# Altium PCB 消防背表.PcbDoc
Units mil, origin at the board's own origin, x right, y up, seen from the top; angles counter-clockwise.
Board outline 6000 x 4000 mil, 2 copper layers (Top Layer, Bottom Layer); 95 components, 78 nets, 353 pads, 243 vias.
Unrouted connection lines stored in the file: 2.
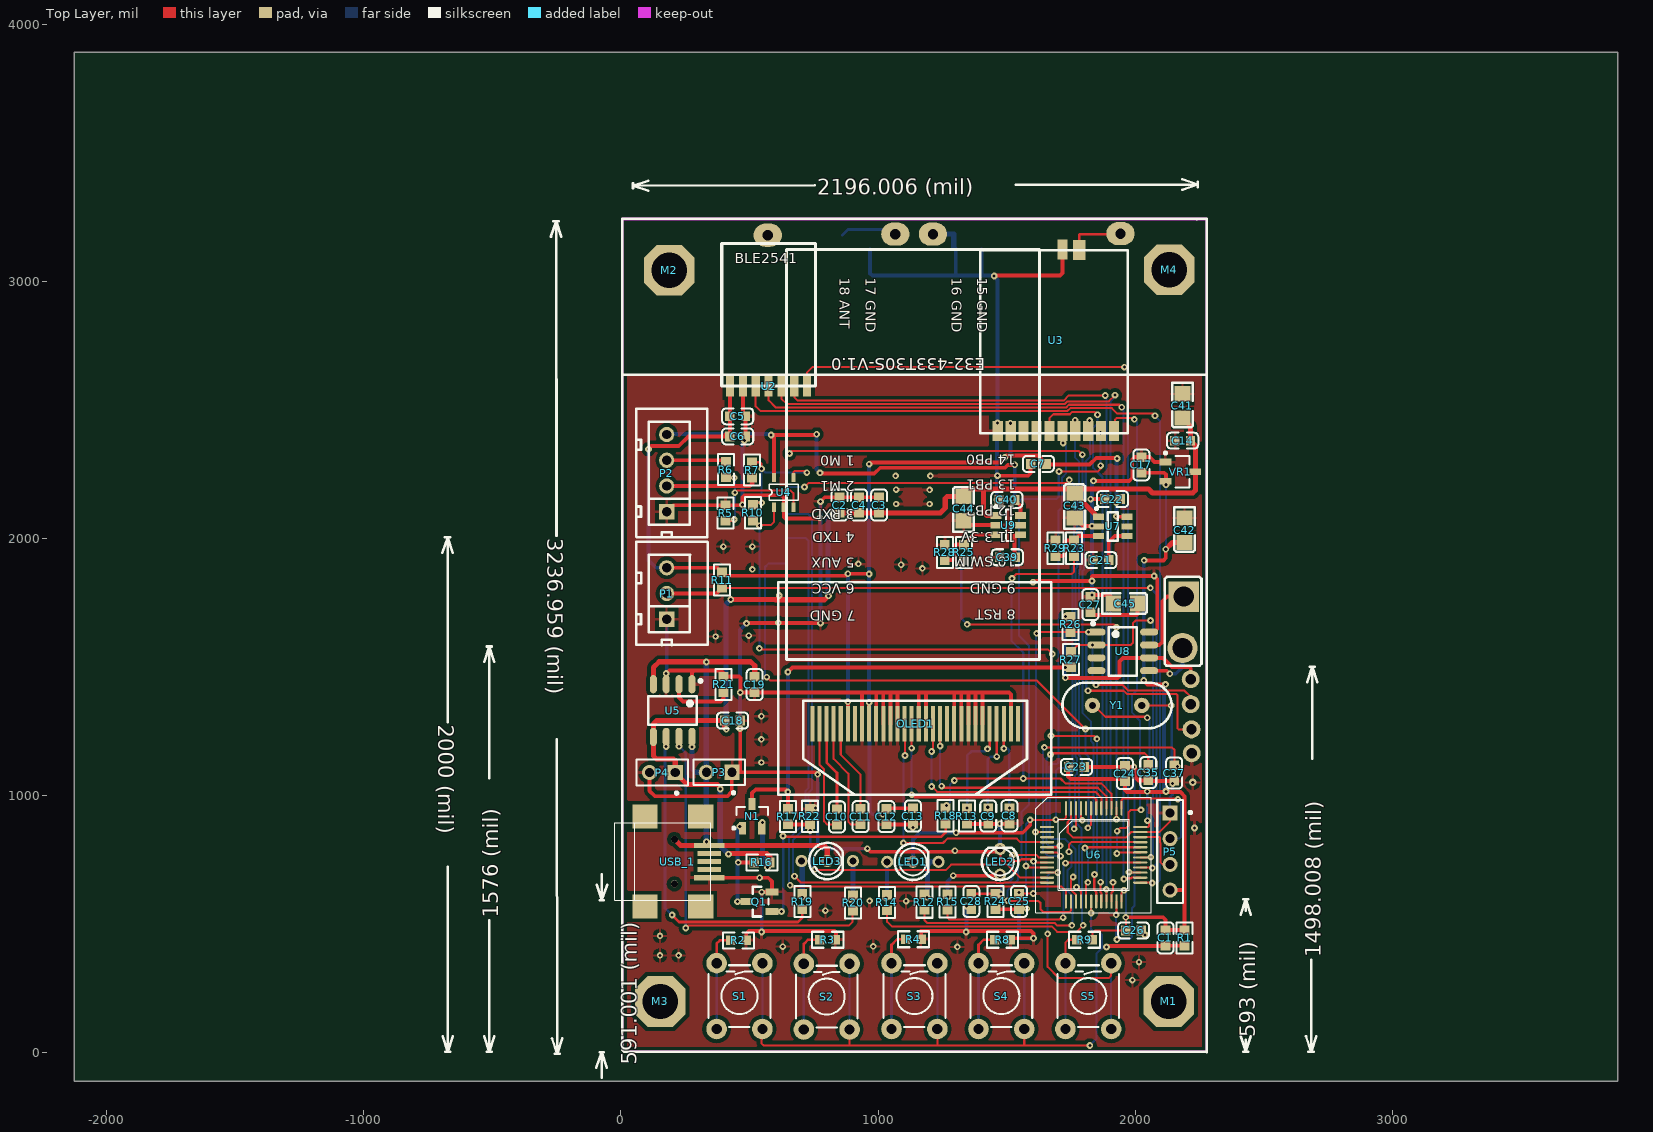
[diagram p0: Top Layer view]
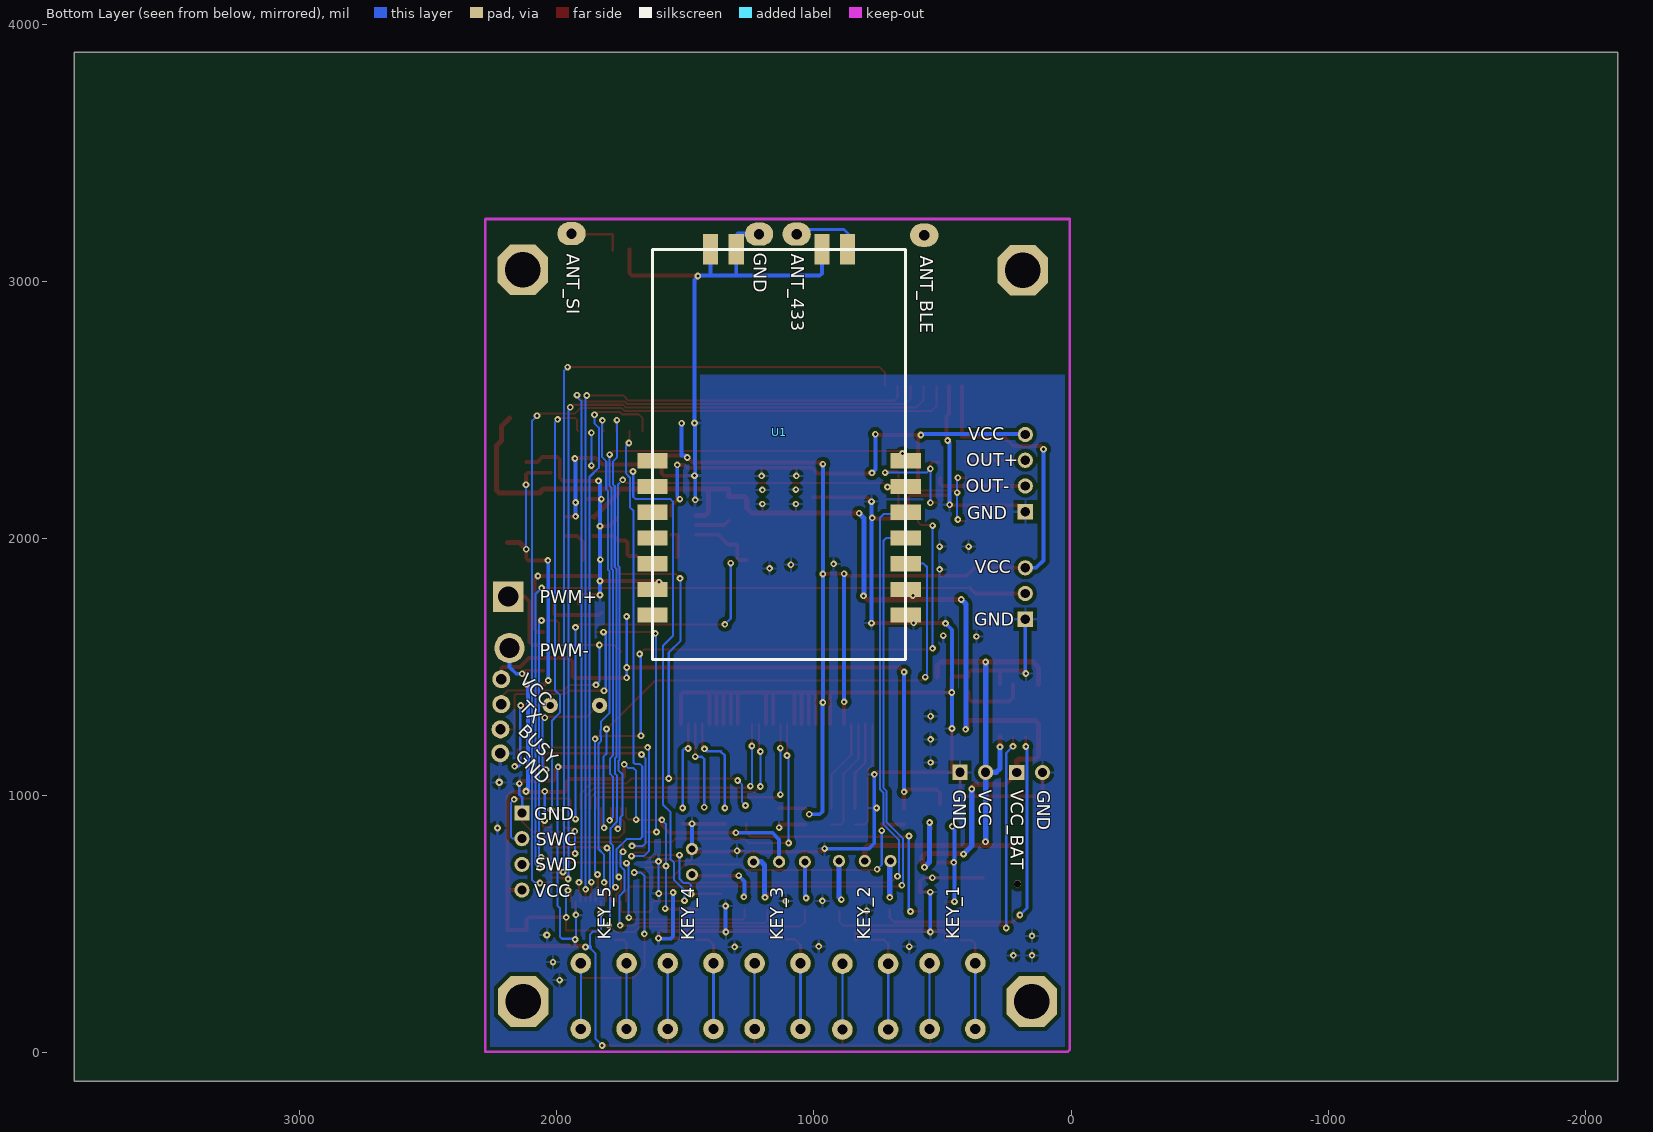
[diagram p1: Bottom Layer view, seen from below]
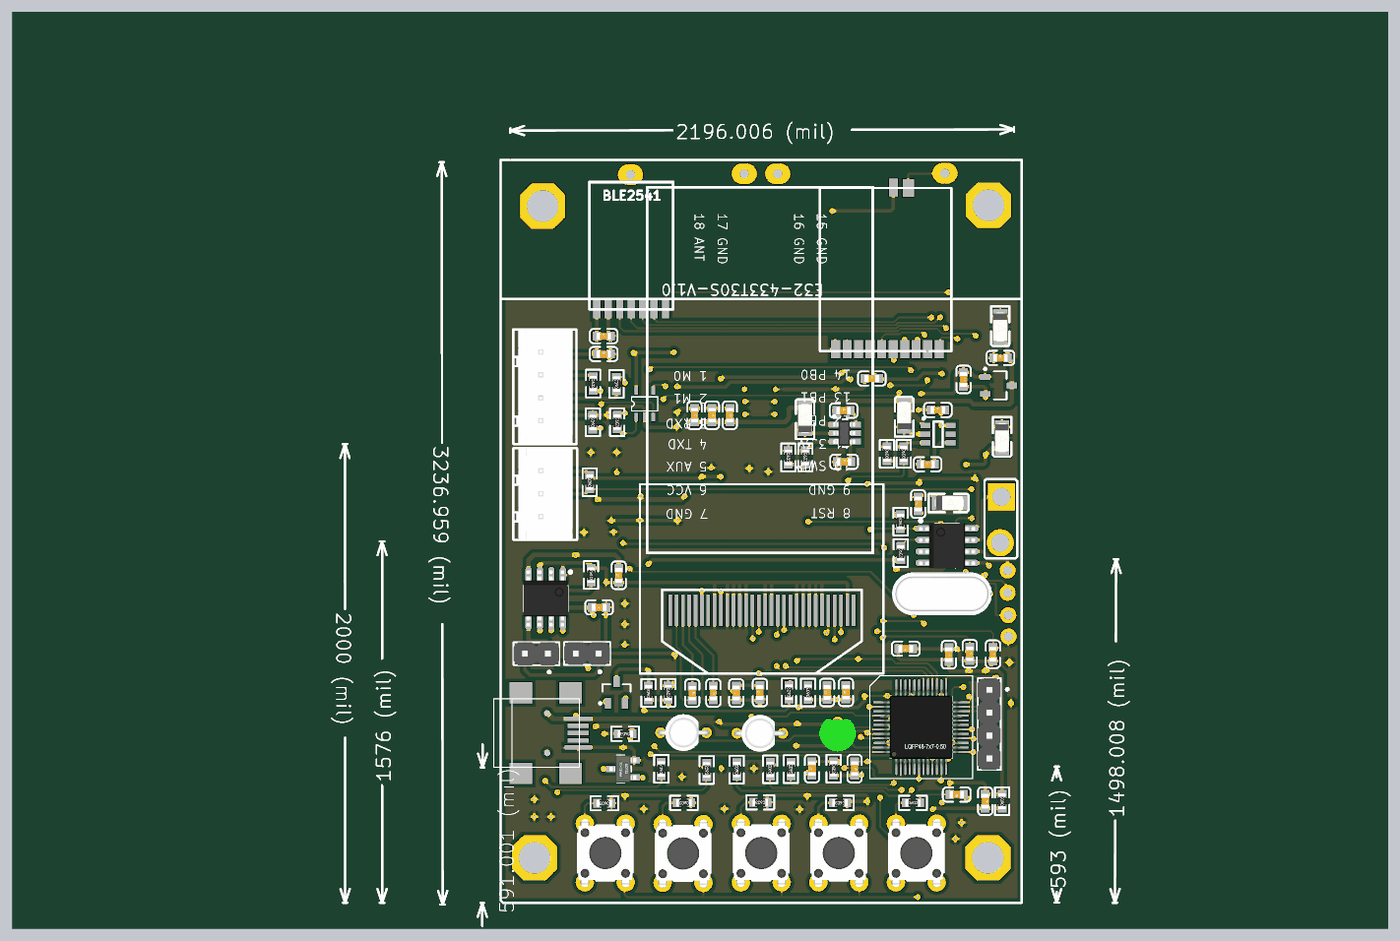
[diagram p2: 3D render of the assembled board from above, using the file's embedded part models]

## Layer stack, top to bottom
Top Solder: solder mask 0.4, Solder Resist, Dk 3.5
Top Layer: signal copper 1.4
Dielectric1: dielectric 12.6, FR-4, Dk 4.8
Bottom Layer: signal copper 1.4
Bottom Solder: solder mask 0.4, Solder Resist, Dk 3.5

## Board outline
-2125,-110 3875,-110 3875,3890 -2125,3890

## Design rules (kind name [scope] priority, off if disabled: settings)
Clearance [All] p1: gap=5 ignorepadtopadclearanceinfootprint=FALSE except(0: Arc-Hole Track-Hole SMDPad-Hole THPad-Hole Via-Hole Fill-Hole Poly-Hole Region-Hole Text-Hole)
PlaneConnect [All] p1: planeconnectstyle=Relief reliefexpansion=20 reliefentries=4 reliefconductorwidth=16 reliefairgap=10
PolygonConnect [All] p1: connectstyle=Relief reliefconductorwidth=10 reliefentries=4 polygonreliefangle="90 Angle" airgapwidth=10
RoutingVias [All] p1: holewidth=12 width=26 viastyle="Through Hole" minholewidth=12 minwidth=26 maxholewidth=12 maxwidth=26
SolderMaskExpansion [All] p1: expansion=4
Width [All] p1: maxlimit=50 minlimit=8 preferedwidth=10
29 further rules are at their usual default settings.

## Components (designator, comment, footprint, x,y, rotation, side; value= is the part's Value field where it differs from the comment)
C1 "100nF (104) 10% 50V" 0603_C 2117,447 r270 top
C2 "1uF (105) 10% 50V" 0603_C 850,2130 r270 top
C3 "10uF (106) 10% 10V" 0603_C 1004,2130 r270 top
C4 "100nF (104) 10% 50V" 0603_C 926,2130 r270 top
C5 "100nF (104) 10% 50V" 0603_C 454,2475 r0 top
C6 "1uF (105) 10% 50V" 0603_C 454,2397 r0 top
C7 "1uF (105) 10% 50V" 0603_C 1623,2290 r0 top
C8 "1uF (105) 10% 50V" 0603_C 1510,922 r90 top
C9 "1uF (105) 10% 50V" 0603_C 1428,921 r90 top
C10 "100nF (104) 10% 50V" 0603_C 840,918 r270 top
C11 "100nF (104) 10% 50V" 0603_C 932,919 r270 top
C12 "100nF (104) 10% 50V" 0603_C 1032,919 r90 top
C13 "1uF (105) 10% 50V" 0603_C 1135,921 r90 top
C14 "100nF (104) 10% 50V" 0603_C 2184,2380 r0 top
C17 "100nF (104) 10% 50V" 0603_C 2023,2286 r270 top
C18 "10uF (106) 10% 10V" 0603_C 434,1292 r180 top
C19 "10uF (106) 10% 10V" 0603_C 520,1432 r90 top
C21 "470pF (471) 10% 50V" 0603_C 1866,1916 r0 top
C22 "100nF (104) 10% 50V" 0603_C 1911,2153 r0 top
C23 "100nF (104) 10% 50V" 0603_C 1771,1112 r180 top
C24 "100nF (104) 10% 50V" 0603_C 1959,1086 r270 top
C25 "100nF (104) 10% 50V" 0603_C 1548,589 r270 top
C26 "100nF (104) 10% 50V" 0603_C 1993,476 r180 top
C27 "4.7uF (475) 10% 16V" 0603_C 1825,1743 r90 top
C28 "100nF (104) 10% 50V" 0603_C 1362,589 r90 top
C35 "22pF (220) 5% 50V" 0603_C 2050,1090 r270 top
C37 "22pF (220) 5% 50V" 0603_C 2151,1088 r270 top
C39 "470pF (471) 10% 50V" 0603_C 1502,1927 r0 top
C40 "100nF (104) 10% 50V" 0603_C 1500,2150 r0 top
C41 "Cap Tan" TAN-A-3216 2183,2515 r270 top
C42 "Cap Tan" TAN-A-3216 2191,2032 r270 top
C43 "Cap Tan" TAN-A-3216 1764,2127 r90 top
C44 "Cap Tan" TAN-A-3216 1332,2116 r90 top
C45 "Cap Tan" TAN-A-3216 1961,1747 r0 top
LED1 "LED-3-DOUBLE" LED-R3-H5-DOUBLE 1135,743 r0 top
LED2 "LED-3-G" LED-R3-H5-SINGLE-G 1474,743 r90 top
LED3 "LED-3-DOUBLE" LED-R3-H5-DOUBLE 802,746 r0 top
M1 "Screw Hole" "Screw hexagon 3mm" 2129,200 r0 top
M2 "Screw Hole" "Screw hexagon 3mm" 188,3042 r0 top
M3 "Screw Hole" "Screw hexagon 3mm" 153,200 r0 top
M4 "Screw Hole" "Screw hexagon 3mm" 2132,3045 r0 top
N1 "P-MOS" SOT23-3 510,921 r90 top
OLED1 "OLED12864" OLED_0.96 1144,1279 r180 top
P1 "Header 3" HX2.54-3 178,1686 r90 top
P2 "Header 4" HX2.54-4 178,2104 r90 top
P3 "Header 2" HDR1X2 432,1091 r180 top
P4 "Header 2" HDR1X2 211,1090 r180 top
P5 "Header 4" HDR1X4 2135,933 r270 top
Q1 "SS8050 Y1" SOT-23(SOT-23-3) 538,588 r0 top
R1 "10KΩ (1002) ±1%" 0603_R 2191,447 r90 top
R2 "100KΩ (1003) ±1%" 0603_R 457,438 r180 top
R3 "20KΩ (2002) ±1%" 0603_R 804,440 r180 top
R4 "10KΩ (1002) ±1%" 0603_R 1137,442 r180 top
R5 "620KΩ (6203) ±1%" 0603_R 407,2099 r90 top
R6 "10KΩ (1002) ±1%" 0603_R 408,2268 r270 top
R7 "10KΩ (1002) ±1%" 0603_R 510,2266 r90 top
R8 "5.1KΩ (5101) ±1%" 0603_R 1484,440 r180 top
R9 "2KΩ (2001) ±1%" 0603_R 1802.68,440 r0 top
R10 "560KΩ (5603) ±1%" 0603_R 513,2100 r270 top
R11 "4.7KΩ (1002) ±1%" 0603_R 393,1838 r90 top
R12 "1KΩ (1001) ±1%" 0603_R 1180,586 r90 top
R13 "390KΩ (3903) ±1%" 0603_R 1345,921 r90 top
R14 "1KΩ (1001) ±1%" 0603_R 1034,585 r90 top
R15 "1KΩ (1001) ±1%" 0603_R 1270,587 r90 top
R16 "4.7KΩ (1002) ±1%" 0603_R 548,741 r180 top
R17 "10KΩ (1003) ±1%" 0603_R 649,919 r90 top
R18 "10KΩ (1002) ±1%" 0603_R 1262,922 r90 top
R19 "1KΩ (1001) ±1%" 0603_R 705,588 r90 top
R20 "1KΩ (1001) ±1%" 0603_R 903,583 r90 top
R21 "2KΩ (2001) ±1%" 0603_R 399,1433 r270 top
R22 "10KΩ (1003) ±1%" 0603_R 735,920 r270 top
R23 "1KΩ (1001) ±1%" 0603_R 1762,1962 r270 top
R24 "10KΩ (1002) ±1%" 0603_R 1456,589 r270 top
R25 "1KΩ (1001) ±1%" 0603_R 1333,1946 r270 top
R26 "10KΩ (1002) ±1%" 0603_R 1748,1666 r90 top
R27 "10KΩ (1002) ±1%" 0603_R 1749,1529 r270 top
R28 "10KΩ (1001) ±1%" 0603_R 1259,1946 r270 top
R29 "10KΩ (1001) ±1%" 0603_R 1689,1962 r270 top
S1 "Switch" Switch1 461,221 r0 top
S2 "Switch" Switch1 800,219 r0 top
S3 "Switch" Switch1 1141,221 r0 top
S4 "Switch" Switch1 1479,221 r0 top
S5 "Switch" Switch1 1817,221 r0 top
U1 "E32-433" E32_433 643,2302 r90 bottom
U2 "CC2541V7" BLE_CC2451 424,2592 r0 top
U3 "SI4463" SI4463 1465,2418 r0 top
U4 "MCP6001" SOT23-5 690,2210 r90 top
U5 "TP4056" SOP-8_150mil 201,1331 r180 top
U6 "STM32F103C6T6_1" LQFP-48 1839,771 r0 top
U7 "SPX3819M5-L-3-3" SOT-23-6#1 1912,2047 r180 top
U8 "WTN" SOP-8_150mil 1951,1561 r270 top
U9 "SPX3819M5-L-3-3" SOT-23-6#2 1506,2052 r0 top
USB_1 "USB" USB-MINI-B 343,807 r270 top
VR1 "XC6206P332MR" SOT-23-3L 2175,2260 r180 top
Y1 "XTAL" XTAL-49/U_N 2025,1351 r180 top

## Footprints (in the part's own frame and the unit in brackets; to place one, negate y for a bottom-side part, rotate by r counter-clockwise, add the part's x,y. Pads: shape width x height; smd on the part's side, far side on the other; paste and mask are expansions set on the pad)
0603_C [mm]
  rect 0.93x0.98 smd: 1(-0.77,0) 2(0.77,0)
  silkscreen extent -1.53,-0.79 1.54,0.79, body extent -0.8,-0.4 0.8,0.4, height 0.3
0603_R [mm]
  rect 0.93x0.98 smd: 1(-0.77,0) 2(0.77,0)
  silkscreen extent -1.53,-0.79 1.54,0.79, body extent -0.85,-0.4 0.85,0.4, height 0.56
BLE_CC2451 [mm]
  rect 0.8x2 smd: 1(0,0) 2(1.27,0) 3(2.54,0) 4(3.81,0) 5(5.08,0) 6(6.35,0) 7(7.62,0)
  silkscreen extent -0.81,0 8.46,14.1
E32_433 [mm]
  rect 1.5x3 smd: 1(0,0) 2(-2.54,0) 3(-5.08,0) 4(-7.62,0) 5(-10.16,0) 6(-12.7,0) 7(-15.24,0) 8(-15.24,25) 9(-12.7,25) 10(-10.16,25) 11(-7.62,25) 12(-5.08,25) 13(-2.54,25) 14(0,25)
  rect 3x1.5 smd: 15(20.88,19.27) 16(20.88,16.73) 17(20.88,8.27) 18(20.88,5.73)
  silkscreen extent -19.62,0 20.88,25
HDR1X2 [mm]
  rect 1.5x1.5 hole 0.9: 1(0,0)
  round 1.5 hole 0.9: 2(2.54,0)
  silkscreen extent -1.27,-1.27 3.81,2.17, body extent -1.27,-1.27 3.81,1.27, height 8.54
HDR1X4 [mm]
  rect 1.5x1.5 hole 0.9: 1(0,0)
  round 1.5 hole 0.9: 2(2.54,0) 3(5.08,0) 4(7.62,0)
  silkscreen extent -1.27,-1.27 8.89,2.14, body extent -1.27,-1.27 8.89,1.27, height 8.54
HX2.54-3 [mm]
  rect 1.5x1.5 hole 0.9: 1(0,0)
  round 1.5 hole 0.9: 2(2.54,0) 3(5.08,0)
  silkscreen extent -2.54,-4.06 7.63,3, body extent -2.41,-3.58 7.59,2.42, height 7
HX2.54-4 [mm]
  rect 1.5x1.5 hole 0.9: 1(0,0)
  round 1.5 hole 0.9: 2(2.54,0) 3(5.08,0) 4(7.62,0)
  silkscreen extent -2.54,-4 10.16,3, body extent -2.4,-3.56 10.12,2.44, height 7
LED-R3-H5-DOUBLE [mm]
  round 1.2 hole 0.7: 1(0,0) 2(-2.54,0) 3(2.54,0)
  silkscreen extent -1.8,-1.79 1.52,1.79, body extent -2.79,-2.04 2.79,2.04, height 5.7
LED-R3-H5-SINGLE-G [mm]
  round 1.2 hole 0.7: 1(-1.27,0) 2(1.27,0)
  silkscreen extent -1.8,-1.8 1.41,1.8, body extent -2,-2 1.52,2, height 5.2
LQFP-48 [mm]
  rect 1.4x0.22 smd: 1(-4.625,2.725)
  oval 1.4x0.22 smd: 2(-4.625,2.225) 3(-4.625,1.725) 4(-4.625,1.225) 5(-4.625,0.725) 6(-4.625,0.225) 7(-4.625,-0.275) 8(-4.625,-0.775) 9(-4.625,-1.275) 10(-4.625,-1.775) 11(-4.625,-2.275) 12(-4.625,-2.775) 25(4.575,-2.775) 26(4.575,-2.275) 27(4.575,-1.775) 28(4.575,-1.275) 29(4.575,-0.775) 30(4.575,-0.275) 31(4.575,0.225) 32(4.575,0.725) 33(4.575,1.225) 34(4.575,1.725) 35(4.575,2.225) 36(4.575,2.725)
  oval 0.22x1.4 smd: 13(-2.775,-4.625) 14(-2.275,-4.625) 15(-1.775,-4.625) 16(-1.275,-4.625) 17(-0.775,-4.625) 18(-0.275,-4.625) 19(0.225,-4.625) 20(0.725,-4.625) 21(1.225,-4.625) 22(1.725,-4.625) 23(2.225,-4.625) 24(2.725,-4.625) 37(2.725,4.575) 38(2.225,4.575) 39(1.725,4.575) 40(1.225,4.575) 41(0.725,4.575) 42(0.225,4.575) 43(-0.275,4.575) 44(-0.775,4.575) 45(-1.275,4.575) 46(-1.775,4.575) 47(-2.275,4.575) 48(-2.775,4.575)
  silkscreen extent -5.72,-5.72 5.67,5.67, body extent -4.53,-4.53 4.47,4.47, height 1.45
OLED_0.96 [mm]
  rect 0.4x3.5 smd: 1(10.15,0) 2(9.45,0) 3(8.75,0) 4(8.05,0) 5(7.35,0) 6(6.65,0) 7(5.95,0) 8(5.25,0) 9(4.55,0) 10(3.85,0) 11(3.15,0) 12(2.45,0) 13(1.75,0) 14(1.05,0) 15(0.35,0) 16(-0.35,0) 17(-1.05,0) 18(-1.75,0) 19(-2.45,0) 20(-3.15,0) 21(-3.85,0) 22(-4.55,0) 23(-5.25,0) 24(-5.95,0) 25(-6.65,0) 26(-7.35,0) 27(-8.05,0) 28(-8.75,0) 29(-9.45,0) 30(-10.15,0)
  silkscreen extent -13.45,-13.97 13.51,6.99
"Screw hexagon 3mm" [mm]
  oct 5x5 hole 3.5: 1(0,0)
SI4463 [mm]
  rect 1x2 smd: 1(0,0) 2(1.276,0) 3(2.551,0) 4(3.827,0) 5(5.103,0) 6(6.378,0) 7(7.654,0) 8(8.93,0) 9(10.205,0) 10(11.481,0) 11(6.401,17.907)
  rect 1.254x2 smd: 12(8.052,17.856)
  silkscreen extent -1.73,-0.23 12.83,17.86
SOP-8_150mil [mm]
  oval 0.7x1.8 smd: 1(-1.905,-2.6) 2(-0.635,-2.6) 3(0.635,-2.6) 4(1.905,-2.6) 5(1.905,2.6) 6(0.635,2.6) 7(-0.635,2.6) 8(-1.905,2.6)
  silkscreen extent -2.9,-3.07 2.4,1.4, body extent -2.5,-3.1 2.5,3.1, height 1.75
SOT23-3 [mm]
  rect 1.2x0.7 smd: 1(-1.2,0.95) 2(-1.2,-0.95) 3(1.2,0)
  silkscreen extent -1.32,-1.55 0.9,1.92, body extent -0.9,-1.55 0.9,1.55, height 1.2
SOT23-5 [mm]
  rect 0.9x0.4 smd: 1(-2.25,2.4) 2(-2.25,1.45) 3(-2.25,0.5) 4(0.7,0.5) 5(0.7,2.4)
  silkscreen extent -1.55,0 0,2.9
SOT-23(SOT-23-3) [mm]
  rect 1.25x0.7 smd: 1(1.25,-0.95) 2(1.25,0.95) 3(-1.25,0)
  silkscreen extent -0.65,-1.46 0.9,1.46, body extent -1.5,-1.5 1.5,1.5, height 1.3
SOT-23-3L [mm]
  rect 1.15x0.65 smd: 1(1.475,-0.95) 2(1.475,0.95) 3(-1.475,0)
  silkscreen extent -0.9,-1.95 1.6,1.55, body extent -0.9,-1.55 0.9,1.55, height 1.25
SOT-23-6#1 [mm]
  rect 1.1x0.6 smd: 1(1.4,-0.95) 2(1.4,0) 3(1.4,0.95) 4(-1.4,0.95) 5(-1.4,0) 6(-1.4,-0.95)
  silkscreen extent -0.5,-1.87 1.72,1.4
SOT-23-6#2 [mm]
  rect 1.1x0.65 smd: 1(-1.2,0.95) 2(-1.2,0) 3(-1.2,-0.95) 4(1.2,-0.95) 5(1.2,0) 6(1.2,0.95)
  silkscreen extent -1.32,-1.55 0.25,1.95, body extent -1.31,-1.4 1.12,1.4, height 1.08
Switch1 [mil]
  round 80 hole 40: 1(-89,-128) 1(-89,128) 2(89,-128) 2(89,128)
  silkscreen extent -120,-120 120,120, body extent -118,-162 118,162, height 213
TAN-A-3216 [mm]
  rect 1.5x1.6 smd: 1(-1.2,0) 2(1.2,0)
  silkscreen extent -2.29,-1.02 2.11,1.02, body extent -1.6,-0.8 1.6,0.8, height 1.6
USB-MINI-B [mm]
  round 0.7 hole 0.7: 0(3.8,-3.435) 1(-0.6,-3.435)
  rect 0.5x3 smd: 1(0,0) 5(3.2,-0.001)
  rect 0.5x2.35 smd: 2(0.8,0) 3(1.6,0) 4(2.4,0)
  rect 2.35x2.5 smd: 6(-2.85,-0.835) 7(-2.85,-6.335) 8(6.05,-6.335) 9(6.05,-0.835)
  silkscreen extent -2.21,-9.34 5.41,0.14, body extent -2.26,-9.39 5.46,0.19, height 6.69
XTAL-49/U_N [mil]
  round 60 hole 28: 1(0,0) 2(192,0)
  silkscreen extent -116,-88 308,89, body extent -117,-88 309,89, height 512

## Part data
C1 C4 C5 C10 C11 C12 C14 C17 C22 C23 C24 C25 C26 C28: library part "0603 100nF (104) 10%"
C2 C6 C7 C8 C9 C13: library part "0603 1uF (105) 10%"
C3 C18 C19: library part "0603 10uF (106) 10%"
C21: library part "0603 470pF (471) 10%"
C27: library part "0603 4.7uF (475) 10%"
C35 C37: library part "0603 22pF (220) 5%"
C39: library part "0603 470p"
C40: library part "0603 100n"
C41 C42 C43 C44 C45: "Polarized Capacitor"
LED1 LED2 LED3: "Typical INFRARE"
M1 M2 M3 M4: library part S
P1 P2 P3 P4 P5: "Head"
Q1: library part "SOT-23 SS8"
R1 R4 R6 R7 R11 R16 R18 R24: library part "0603 10KΩ ("
R2 R17 R22: library part "0603 100KΩ ("
R3: library part "0603 20KΩ ("
R5: library part "0603 620KΩ ("
R8: library part "0603 5.1KΩ ("
R9 R21: library part "0603 2KΩ ("
R10: library part "0603 560KΩ ("
R12 R14 R15 R19 R20 R23: library part "0603 1KΩ ("
R13: library part "0603 390KΩ ("
R25 R26 R27: library part 060
R28 R29: library part "0603 1KΩ (1001) 1%"
U5: library part TP4
U6: "STM32 ARM-based 32-bit MCU with 32 Kbytes Flash, 48-pin LQFP, Indu"
U7: library part SPX3819, "500mA, Low-Noise LDO Voltage"
U9: library part SPX3819, "500mA, Low-Noise"
VR1: library part "SOT-23 XC6206P332MR"
Y1: "Crystal O"

## Free pads (board coordinates)
  oval 110x90 hole 40: 0(571,3179) 0(1067,3183) 0(1213,3183) 0(1942,3185)
  rect 118.11x118.11 hole 78.74: 0(2188,1774)
  round 70 hole 40: 0(2215,1356) 0(2215,1453) 0(2218,1258) 0(2219,1165)
  round 118.11 hole 78.74: 1(2183,1574)

## Via types
v1: diameter 26, hole 12, Top Layer to Bottom Layer, 203 vias
v2: diameter 25, hole 12, Top Layer to Bottom Layer, 36 vias
v3: diameter 28, hole 12, Top Layer to Bottom Layer, 4 vias

## Nets (pads, with @x,y where several pads share a name; then routed paths per layer and width w, separated by ;. In a path a pad name is that pad's centre, name@x,y a point inside that pad or via, vN(x,y) a via of type N, cw(c..) or ccw(c..) an arc to the next point about the centre after c; other vN are vias at no path point)
Air_ADC: R10.2 U4.1 U6.19 | length 2887.2
  Top Layer w8: v1(538,1573) 542,1569 1659,1569 v1(1677,1551) ; v1@538,2052 583,2052 595.51,2064.51 U4.1 ; v1(1672,1233) 1673,1232 1839,1232 v1(1850,1221) ; v1(1841,694) 1840,693 1840,633 1847.86,625.14 U6.19
  Bottom Layer w8: v1(538,1573) v1(538,2050) ; v1(1672,1233) 1673,1234 1673,1547 v1(1677,1551) ; v1(1841,694) 1850,703 v1(1850,1221)
ANT: pad.0@571,3179 pad.0@1067,3183 pad.0@1942,3185 U1.18 U3.12 | length 469.7
  Top Layer w10: pad.0@1063,3179 pad.0@1067,3183 ; U3.12 1782,3180 1785,3183 1940,3183 pad.0@1942,3185
  Bottom Layer w10: U1.18@861,3179 883,3201 1068,3201 pad.0@1087,3182
Batt_ADC: R17.1 R22.2 U6.11 | length 1212.3
  Top Layer w8: R22.2 735,860 736,861 v1(736,864) ; v1(754,714) 757.62,710.38 1262.38,710.38 1284,732 1502,732 1552.57,681.43 U6.11
  Top Layer w15: R17.1 734,888.69 R22.2
  Bottom Layer w8: v1(736,864) 736,732 v1(754,714)
BLE_INT: U2.3 U6.25 | length 3547.9
  Top Layer w8: U2.3 524,2514 542,2496 1736.15,2496 1746.96,2506.81 1908.19,2506.81 1930,2485 2068,2485 v1(2076,2477) ; U6.25 2064.25,661.75 v1(2065,661)
  Bottom Layer w8: v1(2065,661) 2084,661 2095,672 2095,2458 v1(2076,2477)
BLE_RST: U2.7 U6.27 | length 3310.6
  Top Layer w8: U2.7 724,2646 744,2666 v1(1957,2666) ; v1(1975,703) 1976.88,701.12 U6.27
  Bottom Layer w8: v1(1957,2666) 1971,2652 1971,2514 1971,707 v1(1975,703)
BLE_RXD: U2.5 U6.22 | length 3352.2
  Top Layer w8: U2.5 624,2543 644,2523 1726.38,2523 1736.19,2532.81 1896.81,2532.81 v1(1921,2557) ; U6.22 1906.91,622.91 1913,629 v1(1913,663)
  Bottom Layer w8: v1(1913,663) 1904,672 1904,2534 1924,2554 v1(1921,2557)
BLE_TXD: U2.6 U6.21 | length 3234.5
  Top Layer w8: U2.6 674,2549 687,2536 1721,2536 1741,2556 v1(1883,2556) ; v1(1887,636) 1887.23,635.77 U6.21
  Bottom Layer w8: v1(1883,2556) 1887,2552 v1(1887,636)
BLE_WKUP: U2.4 U6.26 | length 3338.7
  Top Layer w8: U2.4 574,2537 602,2509 1730.77,2509 1741.58,2519.81 1937.19,2519.81 v1(1947,2510) ; v1@1958,679 1983,679 1985.43,681.43 U6.26
  Bottom Layer w8: v1(1947,2510) 1953,2504 v1@1953,684
  other v1: 1955,676
DS18B20_DQ: P1.2 R11.1 U6.28 | length 3042.3
  Top Layer w8: R11.1 393.31,1808 v1(2058,1808) ; U6.28 2064.2,720.8 v1(2066,719)
  Top Layer w15: P1.2 371.31,1786 R11.1
  Bottom Layer w8: v1(2058,1808) 2082,1784 2082,735 v1(2066,719)
GND: C2.1 C3.1 C4.1 C5.2 C6.2 C7.1 C8.1 C9.1 C12.1 C13.1 C14.1 C17.1 C18.1 C19.1 C21.1 C22.1 C23.1 C24.1 C25.1 C26.1 C27.2 C28.1 C35.2 C37.2 C39.1 C40.1 C41.1 C42.1 C43.1 C44.1 C45.1 LED2.2 OLED1.8 OLED1.10 OLED1.11 OLED1.12 OLED1.13 OLED1.16 OLED1.17 OLED1.21 OLED1.22 OLED1.23 OLED1.24 OLED1.25 OLED1.29 P1.1 P2.1 P3.1 P4.2 P5.1 pad.0@1213,3183 pad.0@2219,1165 Q1.2 R2.1 R3.1 R4.1 R5.2 R8.1 R13.1 R21.1 R22.1 R28.1 R29.1 U1.7 U1.9 U1.15 U1.16 U1.17 U2.2 U3.1 U3.11 U4.2 U5.1 U5.3 U6.8 U6.23 U6.35 U6.47 U7.2 U8.8 U9.2 USB_1.5 VR1.1 | length 16716
  Top Layer w8: LED2.2@1475,789 1475,752 1481,746 1550,746 1557,753 1596,753 v1(1604,745) 1608.51,740.49 U6.8 ; C25.1 1602.31,619.32 v1(1603,620) ; U6.47 1749.43,910.43 1737,898 1737,858 1758,837 1962,837 1983,858 1983,858.6 U6.35 2092.6,858.6 2135,901 P5.1 ; v1(1925,537) 1926.6,538.6 U6.23
  Top Layer w15: P4.2 111,1019 132,998 414,998 430,1014 431,1014 431,1090 P3.1 P3.1@454,1091 ; v1(176,1475) 188,1487 285,1487 ; P2.1 203.32,2129.32 R5.2 470.32,2129.32 v1(472,2131) 472,2160 480,2168 623,2168 632.91,2158.09 U4.2 632.91,2083.09 639,2077 770,2077 v1(773,2080) ; U5.1 276,1478 285,1487 ; USB_1.5 572.98,681.02 587.21,666.79 Q1.2 v2(547.4,625.4) ; v1(463,1261) 464,1260 464,1101 P3.1@454,1091 ; v1(464,1401) v1@464.68,1401.68 ; U2.2 474,2485.32 C5.2 C6.2 ; R2.1 487.31,463.31 498,474 830,474 836,468 836,441.69 R3.1 ; v1(488,1670) 490,1672 v1(612,1672) 613,1671 v1(776,1671) ; v1(765,1083) 757,1091 P3.1@454,1091 ; v1(776,2143) 775,2143 792.32,2160.32 C2.1 C4.1 C3.1 ; OLED1.8 937.31,1400.99 938,1401.68 ; v2(958,794) 970,782 1135,782 1463,782 LED2.2 ; OLED1.10 992.43,1401.11 993,1401.68 ; OLED1.11 1019.98,1400.7 1019,1401.68 ; C12.1 1133,888.68 1135,886.68 v1(1135,876) ; OLED1.12 1047.54,1401.14 1047,1401.68 ; OLED1.13 1075.1,1401.58 ; OLED1.16 1157.78,1401.47 1158,1401.68 ; R4.1 1167.31,472.48 1166,473.79 1594.21,473.79 1604,464 v1(1604,446) 1520.31,446 R8.1 ; OLED1.17 1185.34,1401.02 1186,1401.68 ; OLED1.21 1295.57,1401.26 1296,1401.68 ; OLED1.22 1323.13,1400.82 1324,1401.68 ; C44.1 1348.76,2052 U9.2 ; R13.1 v1@1474.31,890.69 ; OLED1.23 1350.69,1400.99 ; OLED1.24 1378.25,1400.43 1377,1401.68 ; OLED1.25 1405.81,1401.5 1406,1401.68 ; v1(1451,3020) 1453,3022 1707,3022 1717,3032 U3.11 ; v1(1461,2150) C40.1 ; v1(1464,2244) 1582,2244 1592.69,2254.68 C7.1 ; v1(1474,891) v1@1474.31,890.69 ; C8.1 1509,890.69 v1@1474.31,890.69 ; OLED1.29 1516.05,1393.95 1508.31,1401.68 1406,1401.68 ; C25.1@1547,608 v1(1547,624) ; v1(1602,1830) 1607,1835 v1(1831,1835) 1831,1852 1833,1854 v1(2073,1854) 2085,1842 2085,1647 2074,1636 U8.8 ; C43.1 1795.76,2048 v1(1831,2048) ; C23.1 v2(1994,1112) 2005,1101 2005,1067 2012.31,1059.68 C35.2 2052,1057.68 C37.2@2145,1057.68 ; v2(1826,2153) C22.1 ; v1(1831,1780) 1900,1780 1913.76,1766.24 C45.1 ; v1(1837,2224) 1976,2224 1988,2236 1988,2307 1997.31,2316.32 C17.1 2055.69,2316.32 2074.6,2297.4 VR1.1 ; 285,1487 390,1487 399,1478 R21.1 459.69,1463.31 465,1458 465,1402 v1@464.68,1401.68 ; v1@464.68,1401.68 C19.1 938,1401.68 ; 938,1401.68 993,1401.68 ; 993,1401.68 1019,1401.68 ; 1019,1401.68 1047,1401.68 ; 1047,1401.68 1158,1401.68 ; 1158,1401.68 1186,1401.68 ; 1186,1401.68 1296,1401.68 ; 1296,1401.68 1324,1401.68 ; 1324,1401.68 1377,1401.68 ; 1377,1401.68 1406,1401.68
  Bottom Layer w8: v1@1604,620 v1(1604,745) ; v1(1925,537) 1925,444 v1(1928,441) 1931,444 1979,444 1987,452 1987,563.11 1997,573.11 1997,1109 v2(1994,1112)
  Bottom Layer w10: P5.1 2134,934 2134,993 2145,1004 v1(2145,1047)
  Bottom Layer w15: v1(176,1475) 178,1477 P1.1 ; v1(463,1261) v1@463,1401 ; v1(464,1401) v1@463,1401 ; v1(472,2131) 472,2373 v1(480,2381) ; v1(488,1670) 463,1645 v1@463,1401 ; v1(547,470) 547.4,470.4 v2(547.4,625.4) ; v1(765,1083) 765,814 785,794 v2(958,794) ; v1(773,2080) v1@776,2080 ; v1(776,1671) v1@776,2080 ; v1(776,2143) v1@776,2080 ; U1.17 968.59,3030.41 977,3022 1304,3022 ; U1.16 1301.66,3024.34 1304,3022 ; v1(1342,470) 1343,471 v1(1343,571) ; U1.15 1401.66,3022.66 1401,3022 ; v1(1451,3020) v1@1449,3020 ; v1(1461,2150) 1461,2287 1462,2288 1462,2447 v1(1464,2449) 1464,3005 v1@1449,3020 ; LED2.2 v1(1474,891) ; v1(1547,624) 1547,453 1556,444 1602,444 v1(1604,446) ; v1(1831,1780) v1(1831,1835) v1(1831,2048) 1831,2224 v1(1837,2224) ; 1304,3022 1401,3022 ; 1401,3022 1447,3022 v1@1449,3020
  Bottom Layer w20: pad.0@1213,3183 1294,3183 1294,3131.71 U1.16
  other v1: 1298,786 756,952
  other v2: 1988,283 2014,353 152,379 224,379 1308,412 629,413 981,414 152,455 795,553 1109,590 967,591 539,681.02 546,1129 546,1219 546,1309 368,1619 497,1622 511,1880 1172,1884 1089,1898 923,1901 1830,1917.68 398,1968 511,1968 1070,2134 1200,2134 1200,2189 1070,2190 1068,2243 1203,2243
  other v3: 2038,459 2230,875 2223,1052
KEY_5: S5.2 U6.10 | length 1012.7
  Top Layer w8: U6.10 v1(1698.12,701.12) ; v1(1659,463) 1659,335 1703,291 1896,291 1906,301 S5.2@1906,349
  Bottom Layer w8: v1(1659,463) 1659,689 1671.12,701.12 v1(1698.12,701.12) ; S5.2@1906,93 S5.2@1906,349
KEY_ADC: C1.2 R1.1 S1.2 S2.2 S3.2 S4.2 U6.18 | length 3481.7
  Top Layer w8: S1.2@546,93 546,38 555,29 889,29 ; S2.2@889,91 889,29 ; 1230,30 S3.2@1230,93 ; S4.2@1568,93 1568,30 1567,29 ; v1(1823,29) 1567,29 ; v1(1828.17,544) U6.18 ; 889,29 1567,29
  Top Layer w15: v1(1888,412) 1891.5,415.5 2115.81,415.5 C1.2 R1.1
  Bottom Layer w8: S1.2@550,93 S1.2@550,349 ; S2.2@889,91 S2.2@889,347 ; S3.2@1230,93 S3.2@1230,349 ; S4.2@1568,93 S4.2@1568,349 ; v1(1823,29) 1848,54 1848,385 1870,407 1870,412 1870,461 1859,472 1837,472 1828.17,480.83 v1(1828.17,544)
  Bottom Layer w15: 1870,412 v1(1888,412)
LED_BLUE: R15.1 U6.29 | length 1006.1
  Top Layer w8: R15.1 1270,525 1277,518 1703,518 1719,534 v1(1719,526) ; v1(1728,738) 1730.49,740.49 U6.29
  Bottom Layer w8: v1(1719,526) 1721,528 1721,731 v1(1728,738)
LED_RED: R12.1 U6.33 | length 1235.4
  Top Layer w8: R12.1 1180,516 1191,505 1686,505 1695,496 v1(1753,496) ; v1(1742,782) 1742,810 1751.23,819.23 U6.33
  Bottom Layer w8: v1(1742,782) 1752,772 1752,726 1736,710 1736,630 1755,611 1755,498 v1(1753,496)
LED_YELLOW: R14.1 U6.32 | length 1355.9
  Top Layer w8: R14.1 1035,553.69 1035,510 1053,492 1675,492 1696,471 1772,471 v1(1797,496) ; v1(1804,797) 1806.54,799.54 U6.32
  Bottom Layer w8: v1@1793,496 1793,787 1794,787 v1(1804,797)
NetC8_2: C8.2 OLED1.28 | length 343.8
  Top Layer w10: v1(1488.49,1183.49) OLED1.28
  Bottom Layer w10: v1(1488.49,1183.49) 1502.51,1183.49 1510,1176 v1(1510,952.32)
NetC9_2: C9.2 OLED1.27 | length 357.6
  Top Layer w10: v1(1426,955) 1428,953 C9.2 ; v1(1460.93,1151.93) OLED1.27
  Bottom Layer w10: v1(1426,955) 1426,1142 1435.93,1151.93 v1(1460.93,1151.93)
NetC10_1: C10.1 OLED1.3 | length 347.5
  Top Layer w10: OLED1.3 799.51,1129.49 840,1089 C10.1
NetC10_2: C10.2 OLED1.2 | length 441.6
  Top Layer w8: OLED1.2 771.95,1120.05 790,1102 790,900 802.32,887.68 C10.2
NetC11_1: C11.1 OLED1.5 | length 361.7
  Top Layer w8: OLED1.5 854.63,1159.37 932,1082 C11.1
NetC11_2: C11.2 OLED1.4 | length 456.4
  Top Layer w8: OLED1.4 827.07,1142.93 884,1086 884,898 893.32,888.68 C11.2
NetC21_2: C21.2 U7.4 | length 150.8
  Top Layer w15: C21.2 1896.31,1986.32 1919.6,2009.6 U7.4
NetC28_2: C28.2 R24.1 U6.7 | length 436.9
  Top Layer w8: R24.1 1457.31,618 v1(1477,618) ; v1(1522,769) 1525,769 1526,770 1614,770 1623.83,760.17 U6.7
  Top Layer w10: C28.2 R24.1
  Bottom Layer w8: v1(1477,618) 1477,652 1485,660 1506,660 1522,676 v1(1522,769)
NetC35_1: C35.1 U6.5 Y1.2 | length 1355.2
  Top Layer w8: U6.5 1701.54,799.54 v1(1707,805) ; v1(1670,1160) 1675,1165 2036,1165 2050,1151 C35.1 ; Y1.2@1833,1357 1883,1307 2042,1307 v1(2046,1303) ; v1(2041,1101) 2047,1101 2055,1109 C35.1@2055,1120.32
  Bottom Layer w8: v1(1670,1160) 1654,1144 1654,815 1664,805 v1(1707,805) ; v1(2041,1101) 2055,1115 2055,1294 v1(2046,1303)
NetC37_1: C37.1 U6.6 Y1.1 | length 1489.4
  Top Layer w8: v1(1646,1188) 2142,1188 2152,1178 2152,1125 v1(2163,1114) ; U6.6 1694.14,779.86 v1(1709,765) ; Y1.1 v1(2139.5,1351)
  Bottom Layer w8: v1(1646,1188) 1640,1182 1640,786 1661,765 v1(1709,765)
  Bottom Layer w10: v1(2139.5,1351) 2141,1351 2141,1122 2149,1114 v1(2163,1114)
NetC39_2: C39.2 U9.4 | length 111
  Top Layer w15: C39.2 1530.6,1928.72 1530.6,2014.6 U9.4
NetLED1_2: LED1.2 R14.2 | length 158
  Top Layer w15: v1(1030,602) 1034,606 R14.2
  Bottom Layer w15: v1(1030,602) 1035,607 LED1.2
NetLED1_3: LED1.3 R12.2 | length 190.3
  Top Layer w20: R12.2 1190,606.32 v1(1190,605)
  Bottom Layer w20: v1(1190,605) 1192,607 1192,731 1204,743 LED1.3
NetLED2_1: LED2.1 R15.2 | length 286.1
  Top Layer w15: R15.2 1270,609 v1(1272,607) ; v1(1292,689) LED2.1@1475,689
  Bottom Layer w15: v1(1272,607) 1270,609 1270,667 v1(1292,689)
NetLED3_2: LED3.2 R19.2 | length 159.8
  Top Layer w20: LED3.2 LED3.2@705,743 ; v1(705,605) R19.2
  Bottom Layer w20: LED3.2 705,743 v1(705,605)
NetLED3_3: LED3.3 R20.2 | length 176.6
  Top Layer w20: v1(893,596) 903,606 R20.2 ; LED3.3 LED3.3@903,745
  Bottom Layer w20: v1(893,596) 902,605 LED3.3
NetN1_1: N1.1 Q1.3 R16.2 | length 394.2
  Top Layer w10: v1(453,588) Q1.3
  Top Layer w15: v1(456,741) R16.2
  Bottom Layer w10: v1@453,872 v1(462,881)
  Bottom Layer w15: v1(453,588) v1@453,872
NetOLED1_26: OLED1.26 R13.2 | length 395.3
  Top Layer w10: R13.2 v1(1346,952.32) ; v1(1425,1182) 1433.37,1190.37 OLED1.26
  Bottom Layer w10: v1(1346,952.32) 1346,1156 1362,1172 1415,1172 v1(1425,1182)
NetP5_2: P5.2 U6.37 | length 450.9
  Top Layer w8: U6.37 1946.28,983.28 1952,989 2154,989 2157,986 v1(2165,986)
  Bottom Layer w8: P5.2 2171,833 2177,839 2177,974 v1(2165,986)
NetP5_3: P5.3 U6.34 | length 214.3
  Top Layer w8: U6.34 2092.91,838.91 2093,839 2096.47,835.53 2096.47,816.51 2097,815.99 2097,742 2106,733 P5.3
NetP6_1: pad.0@2188,1774 U8.7 | length 304.5
  Top Layer w15: U8.7 2093,1586 2105,1598 2105,1755 2124,1774 pad.0@2188,1774
NetP6_2: pad.1 U8.5 | length 219.4
  Top Layer w15: U8.5 2122,1486 v1(2134,1474)
  Bottom Layer w15: v1(2134,1474) 2157,1474 2183,1500 pad.1
NetQ1_1: Q1.1 R18.1 | length 1007.5
  Top Layer w10: Q1.1 623.4,550.6 v1(624,550) ; v1(630,843) 632,841 1246,841 1262,857 R18.1
  Bottom Layer w10: v1(624,550) 631,557 631,842 v1(630,843)
NetR2_2: R2.2 S1.1 | length 392.1
  Top Layer w10: S1.1@372,349 372,425 385,438 R2.2
  Bottom Layer w10: S1.1@372,93 S1.1@372,349
NetR3_2: R3.2 S2.1 | length 402.3
  Top Layer w10: S2.1@711,347 711,424 727,440 R3.2
  Bottom Layer w10: S2.1@711,91 S2.1@711,347
NetR4_2: R4.2 S3.1 | length 390.8
  Top Layer w10: S3.1@1052,349 1052,420 1074,442 R4.2
  Bottom Layer w10: S3.1@1052,93 S3.1@1052,349
NetR5_1: R5.1 R6.2 U4.3 | length 523
  Top Layer w8: R5.1 434.69,2068.69 v1(440,2074) ; R6.2 409.68,2236 v1(440,2236) ; v1(443,2178) 451,2186 660,2186 670.32,2175.68 U4.3
  Bottom Layer w8: v1(440,2074) 443,2077 443,2160 444,2161 443,2161 v1(443,2178) 443,2233 v1(440,2236)
NetR7_2: R7.2 R10.1 U4.4 | length 487.3
  Top Layer w8: R7.2 540.68,2296.32 547,2290 v1(547,2271) ; R10.1 521.69,2139 v1(547,2139) ; U4.4 670.32,2257.32 675,2262 717,2262 v1(723,2256)
  Bottom Layer w8: v1(547,2139) v1(547,2271) 562,2256 v1(723,2256)
NetR8_2: R8.2 S4.1 | length 399
  Top Layer w10: S4.1@1390,349 1390,420 1410,440 R8.2
  Bottom Layer w10: S4.1@1390,93 S4.1@1390,349
NetR9_1: R9.1 S5.1 | length 384.9
  Top Layer w8: S5.1@1728,349 1728,429 1739,440 R9.1
  Bottom Layer w8: S5.1@1728,93 S5.1@1728,349
NetR19_1: R19.1 U5.6 | length 1263.8
  Top Layer w10: v1(176,1191) U5.6 ; v1(199,536) 226,509 688,509 707,528 705,530 R19.1
  Bottom Layer w10: v1(176,1191) 171.47,1186.47 171.47,563 172,563 v1(199,536)
NetR20_1: R20.1 U5.7 | length 1455.9
  Top Layer w8: v1(226,1192) U5.7 ; v1(252,486) 261,495 886,495 901,510 901,550.69 R20.1
  Bottom Layer w8: v1(226,1192) 252,1166 v1(252,486)
NetR21_2: R21.2 U5.2 | length 260.6
  Top Layer w15: U5.2 226,1382 242,1366 387,1366 399,1378 R21.2
NetR23_1: R23.1 R29.2 U7.3 | length 227.7
  Top Layer w15: R29.2 1718.68,1931.68 1725,1938 1725,1985 1732.31,1992.31 R23.1 1779.28,2009.6 U7.3
NetR25_1: R25.1 R28.2 U9.3 | length 269.4
  Top Layer w15: R28.2 1290.68,1915.68 1298,1923 1298,1972 1302.31,1976.31 R25.1 1371.28,2014.6 U9.3
"OLED D0": OLED1.18 U6.41 | length 963.9
  Top Layer w8: v1(1208,1036) 1229,1015 1845,1015 1867.54,992.46 U6.41 ; v1(1208,1172) 1212.9,1176.9 OLED1.18
  Bottom Layer w8: v1(1208,1036) v1(1208,1172)
"OLED D1": OLED1.19 U6.40 | length 947.8
  Top Layer w8: OLED1.19 1240.46,1193.54 v1(1241,1193) ; v1(1247,1037) 1253,1031 1854,1031 1887.23,997.77 U6.40
  Bottom Layer w8: v1(1241,1193) 1241,1043 v1(1247,1037)
"OLED DC": OLED1.15 U6.42 | length 1034.2
  Top Layer w8: v1(1130,1004) 1142,994 1839,994 1847.86,985.14 U6.42 ; v1(1130,1185) 1130.22,1186.78 OLED1.15
  Bottom Layer w8: v1(1130,1004) v1(1130,1185)
"OLED RST": OLED1.14 U6.4 | length 1037.7
  Top Layer w8: v1(1098,816) 1252,816 1269,833 1539,833 1552.77,819.23 U6.4 ; OLED1.14 1104,1277.66 v1(1104,1156)
  Bottom Layer w8: v1(1098,816) 1098,1150 v1(1104,1156)
OUT+: P2.3 R6.1 | length 232.4
  Top Layer w15: P2.3 402.31,2304 R6.1
OUT-: P2.2 R7.1 | length 359.2
  Top Layer w15: P2.2 501,2204 511,2214 510,2215 R7.1
POWER_EN: R18.2 R23.2 U6.39 | length 1916.4
  Top Layer w8: v1(1296,1059) 1304,1067 v1(1564,1067) 1709,1067 1728,1048 1867,1048 1906.91,1008.09 U6.39 ; v1(1520,1845) 1537,1862 1753,1862 1762,1871 R23.2
  Bottom Layer w8: v1(1266,962) 1279,975 1279,1042 v1(1296,1059) ; v1(1520,1845) 1518,1843 1518,1602.62 1564,1556.62 v1(1564,1067)
POWER_EN_2: R25.2 U6.38 | length 1636.4
  Top Layer w8: v1(1323,1904) 1333,1914 R25.2 ; v1(1346,1666) 1915.2,1666 v1(1926.6,1654.6) ; v1(1926.6,909) U6.38
  Bottom Layer w8: v1(1323,1904) 1323,1689 v1(1346,1666) ; v1(1926.6,909) v1(1926.6,1654.6)
SI_IRQ: U3.5 U6.20 | length 2168.8
  Top Layer w8: U3.5 1665.89,2468 1680.89,2483 1745,2483 1753,2491 1843,2491 v1(1853,2481) ; v1(1865,664) 1865,624 1867.54,621.46 U6.20
  Bottom Layer w8: v1(1853,2481) 1853,2448 1836,2431 1836,2275 1872,2239 1872,671 v1(1865,664)
SI_SCK: U3.6 U6.15 | length 1960.6
  Top Layer w8: U3.6 1716.11,2373.89 v1(1719,2371) ; v1(1758,684) 1749,675 1749,634.89 1769.12,614.77 U6.15
  Bottom Layer w8: v1(1719,2371) 1731,2359 1731,2253 1715,2237 1715,2122 1701,2108 1701,1129 1695,1123 1676,1123 1667,1114 1667,840 1676,831 1728,831 1767,792 1767,693 v1(1758,684)
SI_SDI: U3.8 U6.17 | length 1957
  Top Layer w8: U6.17 1808.49,656.49 v1(1815,663) ; U3.8 1822,2423.44 v1(1822,2459)
  Bottom Layer w8: v1(1815,663) 1815,771 1837,793 1837,1202.89 1828,1211.89 1828,1230.11 1830,1232.11 1830,1253.38 1828,1255.38 1828,1288 1794,1322 1794,1575 1794,1871.85 1800,1877.85 1800,2184 1807,2191 1807,2300 1823,2316 1823,2458 v1(1822,2459)
SI_SDN: U3.10 U6.31 | length 2023
  Top Layer w8: U3.10 1921,2422 1921,2462 1928,2469 1990,2469 v1(1996,2463) ; v1(1928,775) 1932.86,779.86 U6.31 ; v1(1929,862) 1942,875 1964,875 1974,885 1974,936 1983,945 v1(2022,945)
  Bottom Layer w8: v1(1928,775) 1928,861 v1(1929,862) ; v1@1928.36,862.19 1931,871 v1@1930,872 ; v1(1996,2463) 2007,2452 2007,1411 1986,1390 1986,1324 2018,1292 2018,945 v1(2022,945)
SI_SDO: U3.7 U6.16 | length 1938.9
  Top Layer w8: v1(1766,2460) 1766.33,2459.67 U3.7 ; 1782.45,632.55 1788.8,626.2 U6.16
  Bottom Layer w8: v1(1766,2460) 1766,2314 1781,2299 1781,2210.27 1774,2203.27 1774,1888.62 1768,1882.62 1768,1151 1773,1146 1773,1086 1766,1079 1766,898 1771,893 1771.11,893 1790,874.11 1790,815 1780,805 1780,653 v1(1771,644)
SI_SEL: U3.9 U6.14 | length 2484.7
  Top Layer w8: v1(1503,592) 1503.5,591.5 1622.5,591.5 1631,583 1631,559 1642,548 1744,548 1749.43,553.43 U6.14 ; v1(1703,2260) 1853,2260 1865,2272 v1(1865,2283)
  Bottom Layer w8: v1(1503,592) 1503,632 1543,672 1543,739 1557,753 1557,936 1587,966 1587,1582 1548,1621 1548,2143 1559,2154 1694,2154 1702,2162 1702,2259 v1(1703,2260) ; v1(1865,2283) v1(1865,2411)
SPK_BUSY: pad.0@2218,1258 R26.1 U6.2 U8.1 | length 1827.2
  Top Layer w8: v1(1612,859) 1612.4,858.6 U6.2 ; v1(1616,1631) 1620.69,1635.69 R26.1 1748.31,1636 v1(1818,1636) U8.1 ; v1(1816,1408) 1954.62,1408 1966.62,1396 2158,1396 2163,1391 2163,1263 2168,1258 pad.0@2218,1258
  Bottom Layer w8: v1(1612,859) 1613,860 1613,1628 v1(1616,1631) ; v1(1816,1408) 1809,1415 1809,1627 v1(1818,1636)
SPK_TX: pad.0@2215,1356 R27.1 U6.30 U8.2 | length 1949.9
  Top Layer w8: R27.1 1775.69,1586 v1(1834,1586) U8.2 1982,1586 1990,1594 1990,1670 2001,1681 v1(2059,1681) ; v1(1847,1431) 1950,1431 1972,1409 2190,1409 2215,1384 pad.0@2215,1356 ; U6.30 2059.17,760.17 v1(2060,761)
  Bottom Layer w8: v1(1834,1586) 1834,1444 v1(1847,1431) ; v1(2059,1681) 2069,1671 2069,770 v1(2060,761)
VCC: C19.2 LED3.1 P3.2 U5.4 U5.8 USB_1.1 | length 2075
  Top Layer w20: U5.4 126,1498 149,1521 504,1521 520,1505 C19.2 ; USB_1.1@207.75,830.62 231.37,807 USB_1.1@343,807 ; v1(276,1190) U5.8 ; v1(333,821) 347,807 789,807 802,794 LED3.1
  Bottom Layer w20: v1(276,1190) 276,1106 291,1091 P3.2 ; v1(332,1520) P3.2 ; v1(333,821) 332,822 P3.2
VCC2.5V: C40.2 P2.4 U4.5 U9.6 | length 1892.9
  Top Layer w15: U4.5 595.51,2390.49 v1(584,2402) 758,2402 v1(761,2405) ; v1(774,2255) 777,2252 985,2252 1008,2275 1493,2275 1504,2286 v1(1531,2286) ; v1(1521,2153) C40.2@1527.31,2153 ; C40.2@1533.66,2146.66 1553.24,2127.07 U9.6
  Bottom Layer w15: P2.4 180.5,2406.5 579.5,2406.5 v1(584,2402) ; v1(761,2405) 761,2268 v1(774,2255) ; v1(1521,2153) 1531,2163 v1(1531,2286)
VCC3.3V: C5.1 C6.1 C7.2 C12.2 C13.2 C22.2 OLED1.6 OLED1.9 P1.3 R11.2 U2.1 U3.2 U7.6 | length 5450.8
  Top Layer w15: v1(107,2347) 119,2359 225,2359 263,2397 C6.1 424,2397.32 U2.1 ; P1.3 375.32,1886 R11.2 406.32,1855 874.38,1855 v1(882.19,1862.81) 963.92,1862.81 v1(964.87,1861.87) ; C6.1@407,2405 C6.1@415.68,2405 ; OLED1.6 v1(882.19,1364.81) ; OLED1.9 v1(964.87,1362.13) ; v1(964.87,2289) 970.87,2295 1472,2295 v1(1492,2315) ; C12.2 1034,951.32 C13.2 ; v1@1499,2322 1621.31,2322 C7.2 ; C7.2@1650.96,2287 1822,2287 1848,2313 1927,2313 v1(1929,2311) ; v1(1926,2086) 1927.6,2084.4 U7.6
  Bottom Layer w15: v1(107,2347) 107,1915 136,1886 P1.3 ; v1(882.19,1364.81) v1(882.19,1862.81) ; v1(964.87,2289) v1(964.87,1861.87) v1(964.87,1362.13) 966.74,1360.26 966.74,938.26 977,928 v1(1018,928) ; v1(1492,2315) 1500,2323 1514,2323 v1(1514,2448) ; v1(1926,2086) v1(1926,2140) 1926,2308 v1(1929,2311)
VCC_BAT: C2.2 C3.2 C4.2 C14.2 C18.2 C41.2 C43.2 C44.2 N1.2 P4.1 R16.1 U1.6 U5.5 U7.1 U9.1 VR1.3 | length 4794.1
  Top Layer w20: v1(386,1026) 386,1032 375,1043 258,1043 P4.1 211,1136 205,1142 139,1142 126,1155 U5.5 126,1279 139,1292 C18.2 403.68,1264.32 v1(410,1258) ; v1(418,773) 420.29,775.29 566.71,775.29 578.31,763.69 R16.1 570,732.69 v1(570,722) ; v1(427,1763) 600,1763 601,1762 792,1762 v1(807,1777) ; N1.2 550,876.35 v1(550,896) ; v1(824,2098) 825.68,2099.68 C2.2 C4.2 C3.2 1242.69,2099.68 1261,2118 1261,2156 1268.24,2163.24 C44.2 1332,2193 1410,2193 ; U9.1 1422.6,2089.4 1409,2103 1409,2192 1764,2192 C43.2 1764,2173 1852.6,2084.4 U7.1 ; C43.2@1764,2193 2051,2193 2067,2177 2223,2177 2233.07,2187.07 VR1.3 2233.07,2361.24 C14.2 2214.31,2436.44 C41.2
  Bottom Layer w20: v1(386,1026) 386,805 v1(418,773) ; v1(410,1258) 409,1259 409,1745 v1(427,1763) ; v1(550,896) 550,742 v1(570,722) ; v1(807,1777) 805,1779 805,2079 v1(824,2098)
  other v1: 615,1778
VCC_MP3: N1.3 pad.0@2215,1453 R17.2 R26.2 R27.2 U8.6 | length 2658.1
  Top Layer w15: N1.3 510,1010 524,1024 640,1024 v1(649,1015) R17.2 ; v1(649,1481) 666.68,1498.68 v1(1727.37,1498.68) ; v1(1727.68,1458.68) 1729.37,1457 1931,1457 1938,1464 1938,1522 1952,1536 U8.6 2107,1536 2143,1500 2209,1500 2215,1494 pad.0@2215,1453
  Bottom Layer w10: v1(1727.68,1458.68) v1@1727.68,1498.68 ; v1@1727.68,1499 v1(1727.68,1696.32)
  Bottom Layer w15: v1(649,1015) v1(649,1481)
VCCMP3: C27.1 C45.2 | length 229.3
  Top Layer w15: C27.1 1834.68,1703 2005,1703 2008.24,1706.25 C45.2
VDD3.3: C1.1 C17.2 C23.2 C24.2 C25.2 C26.2 C42.2 LED1.1 P5.4 R1.2 R9.2 R24.2 U6.9 U6.24 U6.36 U6.48 VR1.2 | length 5089.1
  Top Layer w8: C25.2 1575.69,558.68 v1(1578,561) ; v1(1575,727) 1581.2,720.8 U6.9 ; v1(1591,906) v1@1691,906 ; v1(1691,907) 1722,907 1729.75,914.75 U6.48 ; R9.2 1833,465 1844,476 C26.2 v2(1962.69,527.32) ; U6.24 1946.28,622.28 v1(1956,632) ; U6.36 2049.28,878.28 2053,882 2053,897 v1(2047,903)
  Top Layer w15: v1(1303,856) 1562,856 1591,885 v1(1591,906) ; R24.2 C25.2 ; v2(1737,1122) 1738,1121 1738,1075 1748.5,1064.5 1950.19,1064.5 C24.2 1959,1022 1967,1014 2175,1014 2191,998 2191,625 ; v2(1962.69,527.32) 2107.69,527.32 2117,518 C1.1 R1.2 2191,625 ; C17.2 2111.31,2255.68 2119,2248 v1(2119,2209) ; v1(2032.5,1447.5) 2047,1433 v1(2117,1433) ; v1(2034,1915) 2109,1915 2118,1924 v1(2118,1958) ; P5.4 2183,633 2191,625
  Top Layer w20: v1(2118,1958) 2144.76,1984.76 C42.2
  Bottom Layer w8: v1(1578,561) 1575,564 v1(1575,727) 1575,890 v1(1591,906) ; v1(1691,907) 1691,1097 1701,1107 1722,1107 v2(1737,1122) ; v1(1956,632) 1962.69,625.32 v2(1962.69,527.32) ; v1(2046,1017) 2046,904 v1(2047,903) ; v1@2119,1959 v1(2119,2209)
  Bottom Layer w15: LED1.1 1135,830 1161,856 v1(1303,856) ; v1(2032.5,1447.5) 2032.5,1913.5 v1(2034,1915) ; v1(2117,1433) 2111.5,1427.5 2111.5,1024.5 v3(2119,1017)
WIR433_AUX: U1.5 U6.43 | length 2312.9
  Top Layer w8: v1(567,1461) 580,1448 1617,1448 v1(1806,1259) ; v1(1815,875) 1828.17,888.17 U6.43
  Bottom Layer w8: v1(567,1461) 560,1468 560,1889 573,1902 U1.5 ; v1(1806,1259) 1806,1164 1817,1153 1817,877 v1(1815,875)
WIR433_RXD: U1.4 U6.13 | length 2586
  Top Layer w8: v1(658,652) 663.38,646.62 1713.38,646.62 1729.75,630.25 U6.13
  Bottom Layer w8: U1.4 718,2002 730,1990 730,1030.38 716.94,1017.33 716.94,896.94 653,833 653,657 v1(658,652)
WIR433_TXD: U1.3 U6.12 | length 2528.4
  Top Layer w8: v1(675,687) 700.25,661.75 1459.12,661.75 1460.49,660.38 1487.51,660.38 1488.88,661.75 U6.12
  Bottom Layer w8: U1.3 650,2095 728,2095 743,2080 743,1025 729.94,1011.94 729.94,889.06 669.38,828.49 669.38,692.62 v1(675,687)
WIR433M0: U1.1 U6.45 | length 2673.1
  Top Layer w8: v1(655,2330) 665,2340 1780,2340 v1(1794,2326) ; U6.45 1788.8,909.2 v1(1794,904)
  Bottom Layer w8: U1.1 643,2318 v1(655,2330) ; v1(1794,904) 1781,917 1781,1074 1792,1085 1792,1145.38 1781,1156.38 1781,1877.23 1787,1883.23 1787,2197.89 1794,2204.89 v1(1794,2326)
WIR433M1: U1.2 U6.46 | length 2561.6
  Top Layer w8: v1(714,2200) 730,2216 1731,2216 v1(1743,2228) ; v1(1762,871) 1769.12,878.12 U6.46
  Bottom Layer w8: U1.2 645,2200 v1(714,2200) ; 1755,2216 1761,2210 1761,1894 1755,1888 1755,1140 1760,1135 1760,1099 1744,1083 1744,924 1752.5,915.5 1752.5,880.5 v1(1762,871)
pads on no net: M1.1 M2.1 M3.1 M4.1 OLED1.1 OLED1.7 OLED1.20 OLED1.30 U1.8 U1.10 U1.11 U1.12 U1.13 U1.14 U3.3 U3.4 U6.1 U6.3 U6.44 U7.5 U8.3 U8.4 U9.5 USB_1.0 USB_1.2 USB_1.3 USB_1.4 USB_1.6 USB_1.7 USB_1.8 USB_1.9

## Polygon pours and split planes (outlines as drawn)
GND on Top Layer "Bottom Layer-No Net" (solid, remove dead copper, pour order 7): 5,2637 6,2638 2278,2638 2278,4 14,4 5,13
no net on Top Layer "Top Layer-No Net" (solid, remove dead copper, pour order 6): -1238,2617
GND on Bottom Layer "Bottom Layer-No Net" (solid, remove dead copper, pour order 9): 5,2637 2278,2637 2278,4 14,4 5,13

## Keep-outs
Keep-Out Layer:
  lines w10: 5,13 14,4 2278,4 2278,3240 2276,3242 6,3242 5,3241 5,13

## Silkscreen, mask and mechanical layers (free items; w line width, h text height)
Top Overlay:
  lines w10: -693.97,1943.99 -674,2004 ; -693.03,63.99 -673,4 ; -684,2003.99 -664,2004.01 ; -683,4 -663,4.01 ; -673.64,1284.91 -674,2004 ; -673.36,723.09 -673,4 ; -653.97,1944.01 -674,2004 ; -653.03,64.01 -673,4 ; -532,64 -512,4 ; -532,1520 -512,1580 ; -522,4 -502,4 ; -522,1580 -502,1580 ; -512,516.08 -512,4 ; -512,1067.92 -512,1580 ; -492,64 -512,4 ; -492,1520 -512,1580 ; -271.92,3172.97 -252,3233 ; -267.95,56.02 -247.87,-3.96 ; -262,3232.99 -242,3233.01 ; -257.87,-3.97 -237.87,-3.94 ; -250.44,2010.4 -252,3233 ; -249.43,1218.64 -247.87,-3.96 ; -231.92,3173.03 -252,3233 ; -227.95,56.07 -247.87,-3.96 ; -95.1,-56.97 -75,3 ; -93.9,654.03 -74,594 ; -82.87,3.01 -67.13,2.99 ; -81.87,594.01 -66.13,593.99 ; -75.17,-97 -75,3 ; -73.83,694 -74,594 ; -55.1,-57.03 -75,3 ; -53.9,653.97 -74,594 ; 5,2637 2277,2637 ; 47.02,3361 46.98,3381 ; 106.95,3391.14 47,3371 ; 107.05,3351.14 47,3371 ; 754.12,3372.61 47,3371 ; 1535.88,3374.39 2243,3376 ; 2182.95,3395.86 2243,3376 ; 2183.05,3355.86 2243,3376 ; 2238,3242 2239,3243 ; 2243.02,3366 2242.98,3386 ; 2409,65 2429,5 ; 2409,538 2429,598 ; 2419,5 2439,5 ; 2419,598 2439,598 ; 2429,50.58 2429,5 ; 2429,552.42 2429,598 ; 2449,65 2429,5 ; 2449,538 2429,598 ; 2663.2,64.07 2683,4 ; 2667.8,1442.07 2688,1502 ; 2673,4.03 2693,3.97 ; 2678,1502.03 2698,1501.97 ; 2684.2,362.12 2683,4 ; 2686.8,1143.88 2688,1502 ; 2703.2,63.93 2683,4 ; 2707.8,1441.93 2688,1502 ; 5,13.8 14.8,4 46,4 2233,4 2276,4 2277,3 2277,3243 2238,3243 45,3243 5,3243 5,13.8 ; 2114,1513 2114,1840 2114,1843 2122,1851 2249,1851 2257,1843 2257,1513 2250,1506 2121,1506 2114,1513
  text "2196.006 (mil)" at 764.2,3336.64 h60 r0.13
  text "3236.959 (mil)" at -286.42,2000.35 h60 r270.07
  text "2000 (mil)" at -709.63,1274.9 h60 r270.03
  text "1576 (mil)" at -476.01,526.08 h60 r90
  text "1498.008 (mil)" at 2720.22,372 h60 r89.81
  text "593 (mil)" at 2464.99,60.58 h60 r90
  text "591.001 (mil)" at 60.63,-45.56 h60 r89.9
Bottom Overlay:
  text "GND" at 1234,3110 h50 r90
  text "ANT_SI" at 1960,3107 h50 r90
  text "ANT_433" at 1088,3106 h50 r90
  text "ANT_BLE" at 587,3099 h50 r90
  text "VCC" at 399,2382 h50
  text "OUT+" at 408,2280 h50
  text "OUT-" at 409,2179 h50
  text "GND" at 403,2075 h50
  text "VCC" at 375,1865 h50
  text "PWM+" at 2065,1749 h50
  text "GND" at 377,1661 h50
  text "PWM-" at 2066,1541 h50
  text "VCC" at 2147,1445 h50 r45
  text "TX" at 2149,1338 h50 r45
  text "BUSY" at 2153,1246 h50 r45
  text "GND" at 2164,1149 h50 r45
  text "VCC_BAT" at 235,1023 h50 r90
  text "VCC" at 358,1023 h50 r90
  text "GND" at 458,1023 h50 r90
  text "GND" at 132,1021 h50 r90
  text "GND" at 2086,905 h50
  text "SWC" at 2082,806 h50
  text "SWD" at 2084,709 h50
  text "VCC" at 2086,606 h50
  text "KEY_1" at 435,442 h50 r270
  text "KEY_2" at 781,440 h50 r270
  text "KEY_5" at 1790,440 h50 r270
  text "KEY_3" at 1119,439 h50 r270
  text "KEY_4" at 1464,438 h50 r270

## Text inside footprints (layer, text, board x,y; h text height)
U1: Top Overlay "7 GND" at 912.68,1719.52 h39.37 r180; Top Overlay "15 GND" at 1385.09,3014.24 h39.37 r270; Top Overlay "16 GND" at 1286.27,3014.24 h39.37 r270; Top Overlay "17 GND" at 952.02,3014.24 h39.37 r270; Top Overlay "18 ANT" at 851.62,3014.24 h39.37 r270; Top Overlay "1 M0" at 908.67,2321.37 h39.37 r180; Top Overlay "2 M1" at 908.67,2221.76 h39.37 r180; Top Overlay "3 RXD" at 908.67,2113.1 h39.37 r180; Top Overlay "4 TXD" at 908.67,2023.73 h39.37 r180; Top Overlay "5 AUX" at 908.67,1925.31 h39.37 r180; Top Overlay "6 VCC" at 908.67,1824.13 h39.37 r180; Top Overlay "8 RST" at 1534.57,1722.83 h39.37 r180; Top Overlay "9 GND" at 1534.57,1824.4 h39.37 r180; Top Overlay "10 SWIM" at 1534.57,1928.73 h39.37 r180; Top Overlay "11 3.3V" at 1534.57,2024.8 h39.37 r180; Top Overlay "12 PB3" at 1534.57,2126.37 h39.37 r180; Top Overlay "13 PB1" at 1534.57,2227.94 h39.37 r180; Top Overlay "14 PB0" at 1534.57,2326.37 h39.37 r180; Top Overlay "E32-433T30S-V1.0" at 1416.62,2700.82 h47.24 r180
U2: Top Overlay "BLE2541" at 442,3069 h39.37